# Altium PCB PCB1.PcbDoc
Units mm, origin at the board's own origin, x right, y up, seen from the top; angles counter-clockwise.
Board outline 28.7 x 18.5 mm, 2 copper layers (Top Layer, Bottom Layer); 7 components, 5 nets, 21 pads, 2 vias.
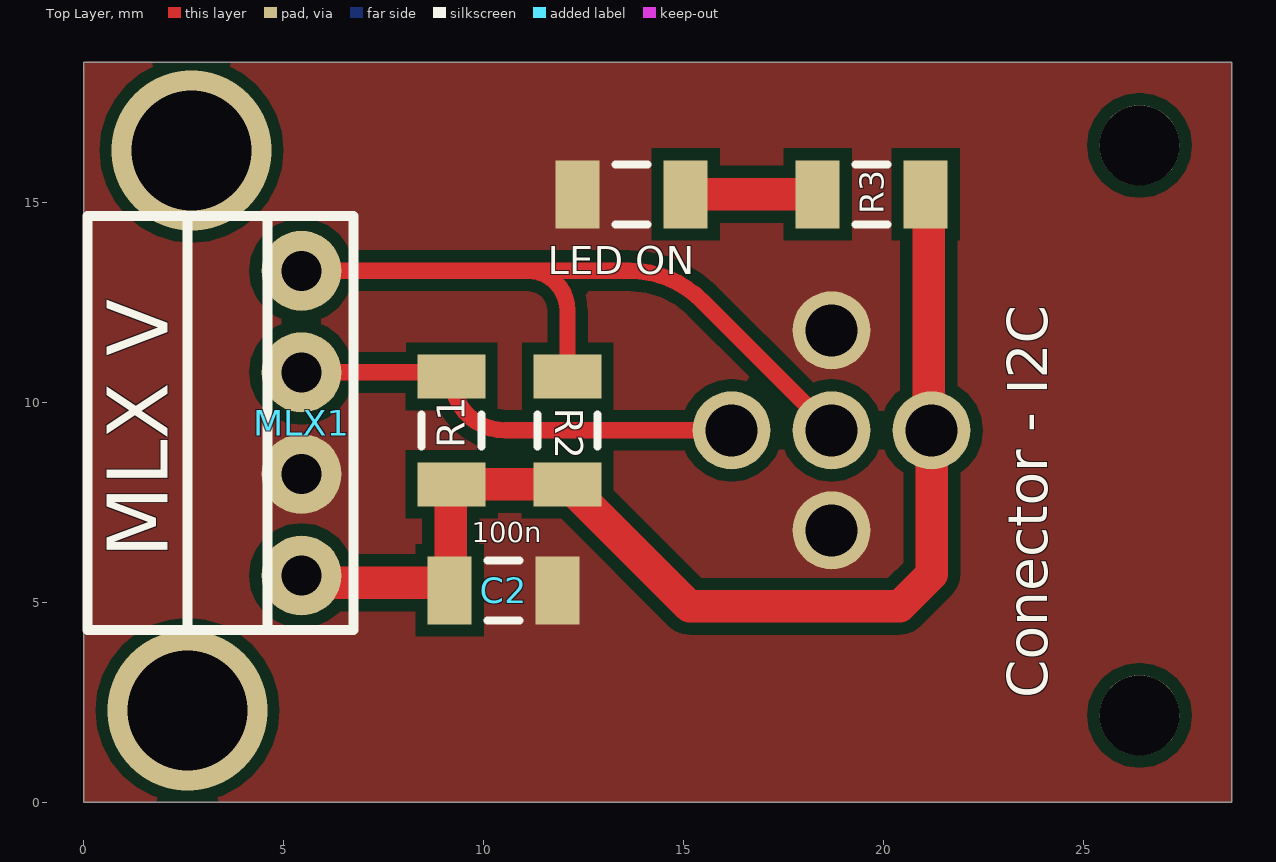
[diagram p0: Top Layer view]
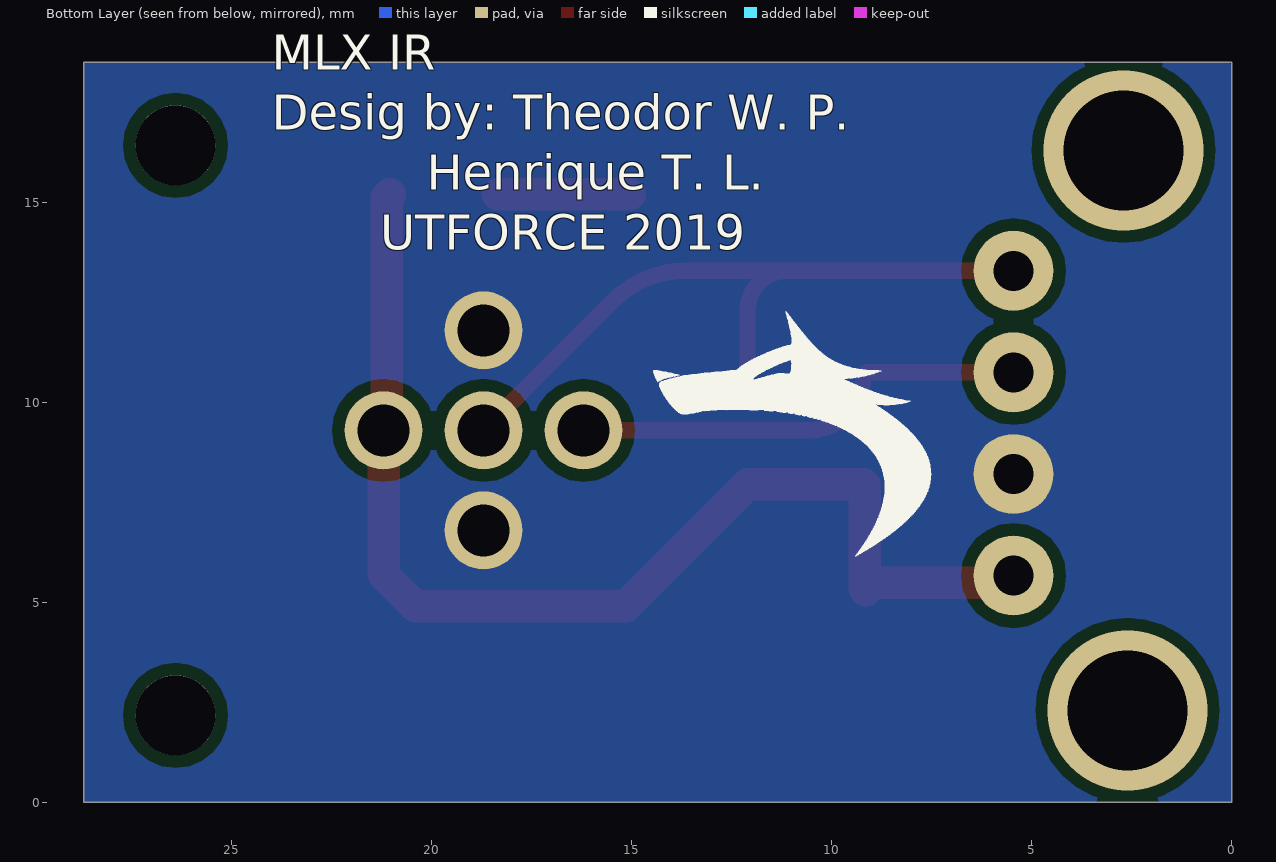
[diagram p1: Bottom Layer view, seen from below]

## Layer stack, top to bottom
Top Solder: solder mask 0.0102, Solder Resist, Dk 3.5
Top Layer: signal copper 0.0356
Dielectric 1: dielectric 0.32, FR-4, Dk 4.8
Bottom Layer: signal copper 0.0356
Bottom Solder: solder mask 0.0102, Solder Resist, Dk 3.5

## Board outline
0,0 0,18.5 28.7,18.5 28.7,0

## Design rules (kind name [scope] priority, off if disabled: settings)
Clearance [All] p1: gap=0.3 ignorepadtopadclearanceinfootprint=FALSE
PlaneConnect [All] p1: planeconnectstyle=Direct reliefexpansion=0.508 reliefentries=4 reliefconductorwidth=0.254 reliefairgap=0.254
PolygonConnect [All] p1: connectstyle=Direct reliefconductorwidth=0.254 reliefentries=4 polygonreliefangle="90 Angle" airgapwidth=0.254
RoutingVias [All] p1: holewidth=0.711 width=1.27 viastyle="Through Hole" minholewidth=0.711 minwidth=1.27 maxholewidth=0.711 maxwidth=1.27
SolderMaskExpansion [All] p1: expansion=0.102
Width [All] p1: maxlimit=0.813 minlimit=0.254 preferedwidth=0.406
29 further rules are at their usual default settings.

## Components (designator, comment, footprint, x,y, rotation, side; value= is the part's Value field where it differs from the comment)
C2 "100n" C1206 10.5,5.3 r180 top
"Conector - I2C" "" RSWF-5 18.7,9.3 r90 top
"LED ON" "LED3" C1206 13.7,15.2 r180 top (schematic designator LED_ON)
MLX1 "Shield_MLX-V" Shield_MLX-V 2.6,4.305 r0 top locked
R1 "Res3" C1206 9.2,9.297 r90 top value=10K
R2 "Res3" C1206 12.1,9.3 r90 top value=10K
R3 "330" C1206 19.7,15.2 r0 top

## Footprints (in the part's own frame and the unit in brackets; to place one, negate y for a bottom-side part, rotate by r counter-clockwise, add the part's x,y. Pads: shape width x height; smd on the part's side, far side on the other; paste and mask are expansions set on the pad)
C1206 [mm] "Chip Capacitor, Body 3.2x1.6mm, IPC High Density"
  rect 1.1x1.7 smd: 1(-1.35,0) 2(1.35,0)
  silkscreen extent -0.4,-0.75 0.4,0.75, body extent -1.7,-0.9 1.7,0.9, height 1.3
RSWF-5 [mm]
  round 1.95 / inner round 1.524 / far side round 1.95 hole 1.3: 1(2.5,0) 2(0,-2.5) 3(-2.5,0) 4(0,2.5) 5(0,0)
  round 2 hole 2 unplated: MH1(7.125,-7.7) MH2(-7.125,-7.7)
Shield_MLX-V [mm]
  round 2 hole 1: GND(2.85,3.905) SCL(2.85,6.445) SDA(2.85,8.985) VCC(2.85,1.365)
  silkscreen extent -2.5,0 4.15,10.35, body extent -5.6,-6.21 27.43,10.35, height 18

## Part data
C2: library part "Cap Semi", "Capacitor (Semiconductor SIM Model)", LatestRevisionDate=29-May-2009, LatestRevisionNote="IPC-7351 Footprint Added.", PackageDescription="Chip Capacitor", PackageReference=C1206, Published=8-Jun-2000, Publisher="Altium Limited"
"Conector - I2C": library part RSWF-5, DeviceSetName=RSWF-5, GateName_1=G$1, LibraryName=RSWF-5, Package=RSWF-5, SymbolName_1=RSWF-5
"LED ON": "Typical BLUE SiC LED", DatasheetVersion=16-Apr-2002, LatestRevisionDate=17-Dec-2003, LatestRevisionNote="PCB Footprint replaced.", PackageDescription="SM LED; 2 C-Bend Leads; Body 3.5 x 2.8 x 1.9 mm, inc leads (LxWxH typ)", PackageReference=3.5X2.8X1.9, PackageVersion=16-Apr-2002, Published=8-Jun-2000, Publisher="Altium Limited"
R1 R2: "Resistor", LatestRevisionDate=29-May-2009, LatestRevisionNote="IPC-7351 Footprint Added.", PackageDescription="Chip Resistor", PackageReference=J1-0603, Published=8-Jun-2000, Publisher="Altium Limited"
R3: library part Res3, "Resistor", LatestRevisionDate=29-May-2009, LatestRevisionNote="IPC-7351 Footprint Added.", PackageDescription="Chip Resistor", PackageReference=J1-0603, Published=8-Jun-2000, Publisher="Altium Limited"

## Via types
v1: diameter 4, hole 3, Top Layer to Bottom Layer, 2 vias

## Nets (pads, with @x,y where several pads share a name; then routed paths per layer and width w, separated by ;. In a path a pad name is that pad's centre, name@x,y a point inside that pad or via, vN(x,y) a via of type N, cw(c..) or ccw(c..) an arc to the next point about the centre after c; other vN are vias at no path point)
+5V: "Conector - I2C.2" C2.2 MLX1.VCC R1.1 R2.1 R3.2 | length 29.7
  Top Layer w0.813: MLX1.VCC 5.635,5.485 9.006,5.485 9.15,5.342 C2.2 9.175,5.325 9.175,7.922 R1.1 9.201,7.949 R2.1 R2.1 15.15,4.9 20.4,4.9 21.2,5.7 21.2,9.3 21.125,9.375 21.125,15.125 R3.2
GND: "Conector - I2C.1" "Conector - I2C.3" "LED ON.2" C2.1 MLX1.GND
"NetConector - I2C_4": "Conector - I2C.4" MLX1.SCL R1.2 | length 11.6
  Top Layer w0.406: MLX1.SCL 9.097,10.75 cw(c9.097,10.647) R1.2 ccw(c10.548,10.647) 10.548,9.3 16.2,9.3
"NetConector - I2C_5": "Conector - I2C.5" MLX1.SDA R2.2 | length 18
  Top Layer w0.406: MLX1.SDA 11.1,13.29 ; R2.2 12.1,12.29 ccw(c11.1,12.29) 11.1,13.29 ; 18.7,9.3 15.454,12.546 ccw(c13.658,10.75) 13.658,13.29 11.1,13.29
NetLED_ON_1: "LED ON.1" R3.1 | length 3.3
  Top Layer w0.813: 15.05,15.2 R3.1
pads on no net: "Conector - I2C.MH1" "Conector - I2C.MH2"
copper on no net:
  other v1: 2.6,2.3 2.7,16.3

## Polygon pours and split planes (outlines as drawn)
GND on Top Layer "Top Layer-GND" (solid, pour order 2): 0,18.521 0,0 28.7,0 28.7,18.5
GND on Bottom Layer "Bottom Layer-GND" (solid, pour order 4): 0,18.521 0,0 28.7,0 28.7,18.5

## Silkscreen, mask and mechanical layers (free items; w line width, h text height)
Bottom Overlay:
  drawing of 2 lines, arcs and shapes, not listed
  text "MLX IR / Desig by: Theodor W. P. /           Henrique T. L. /        UTFORCE 2019" at 24,13.534 h1.5

## Text inside footprints (layer, text, board x,y; h text height)
MLX1: Top Overlay "MLX V" at 2.1,6.105 h1.52 r90